# Altium PCB NEMA_PANDORA_PCB.PcbDoc
Units mm, origin at the board's own origin, x right, y up, seen from the top; angles counter-clockwise.
Board outline 63 x 63 mm, 2 copper layers (Top Layer, Bottom Layer); 77 components, 54 nets, 289 pads, 131 vias.
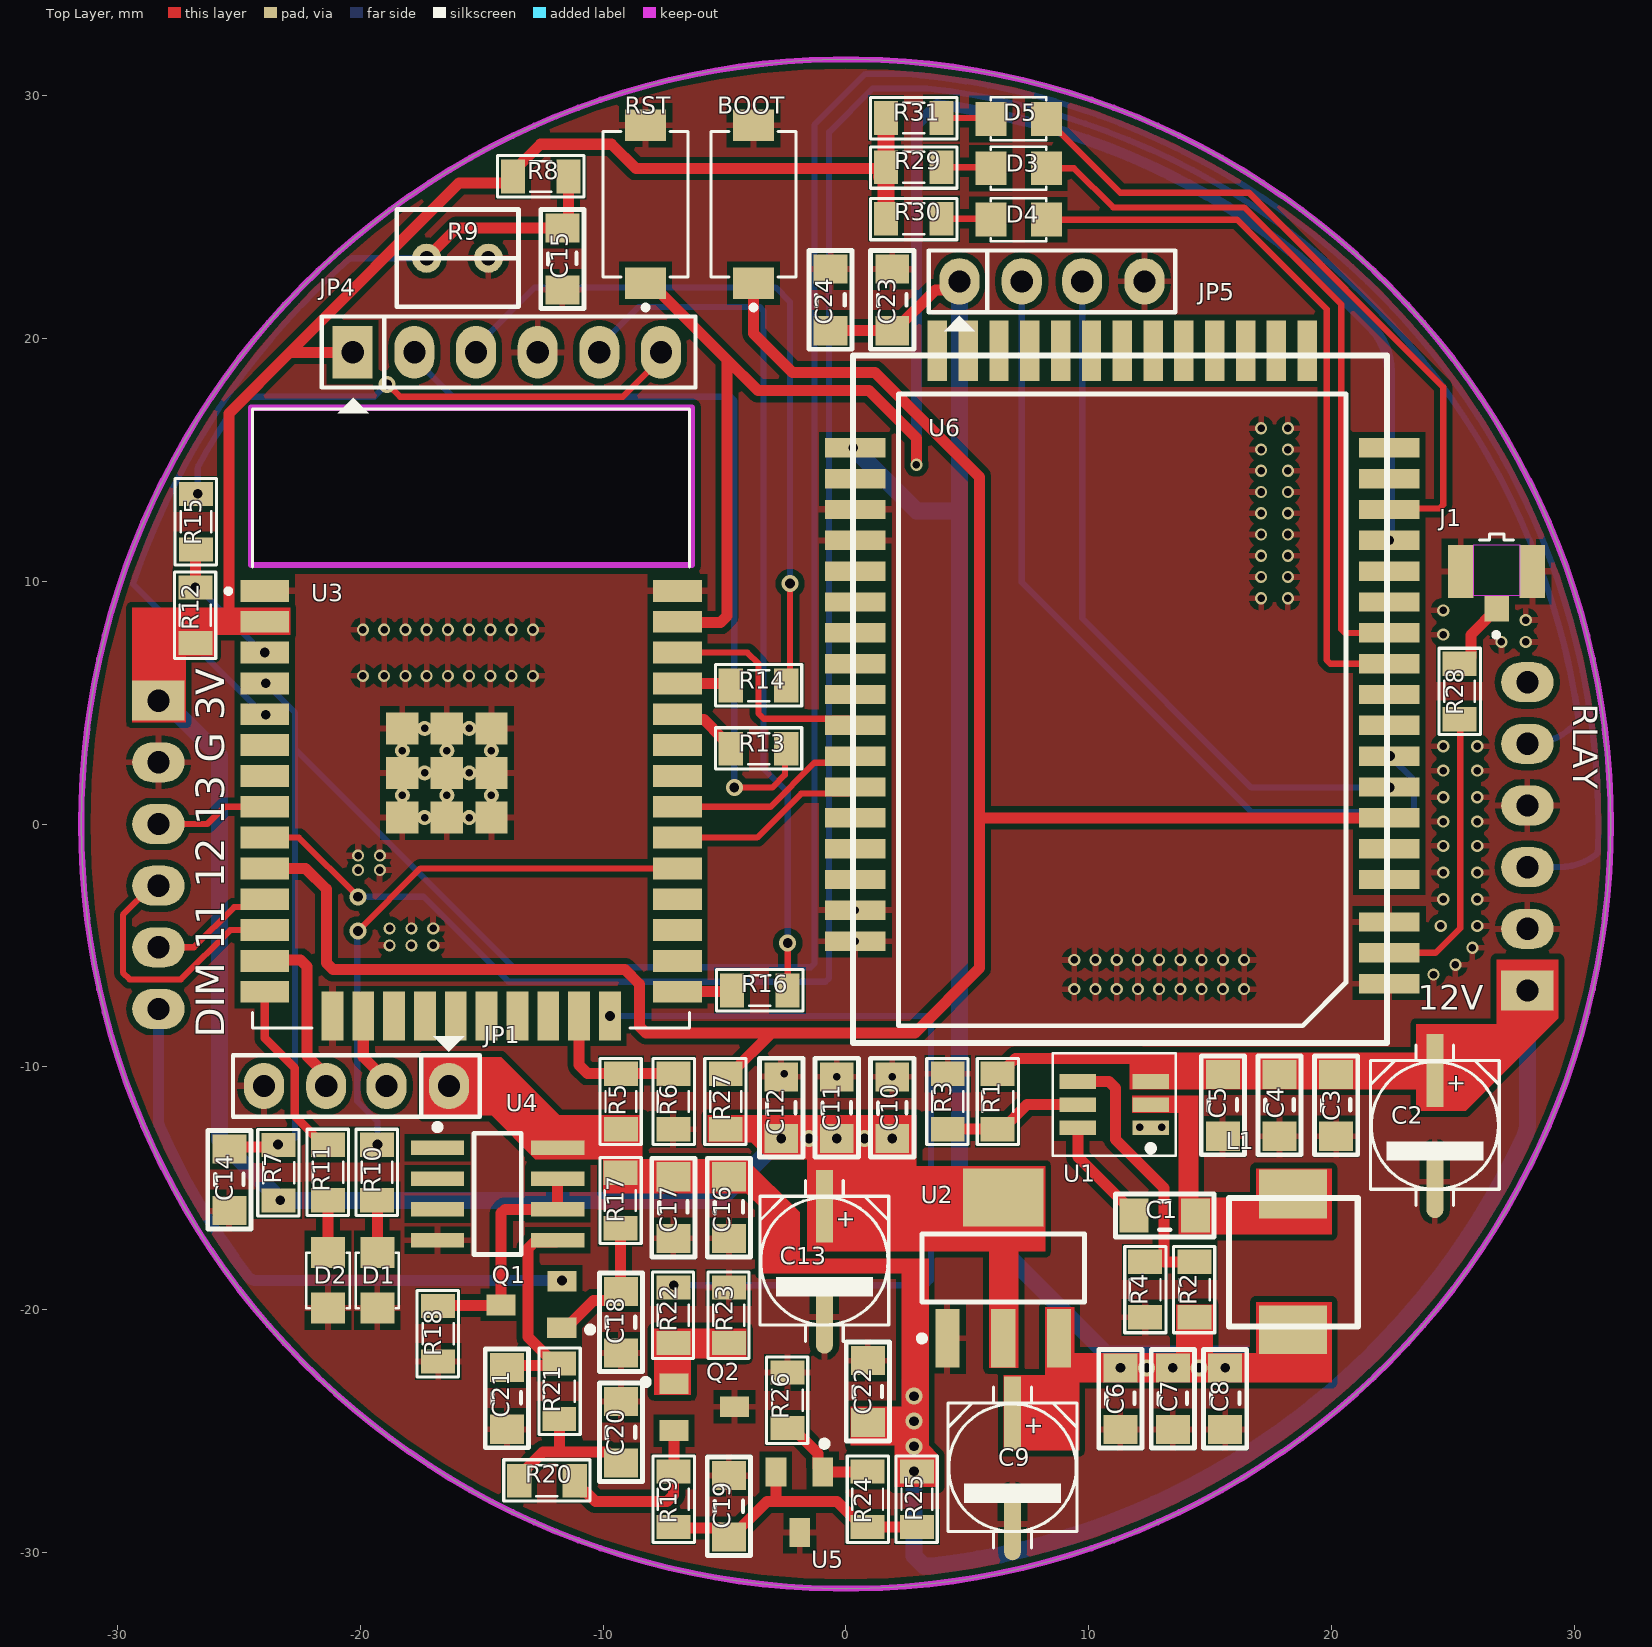
[diagram p0: Top Layer view]
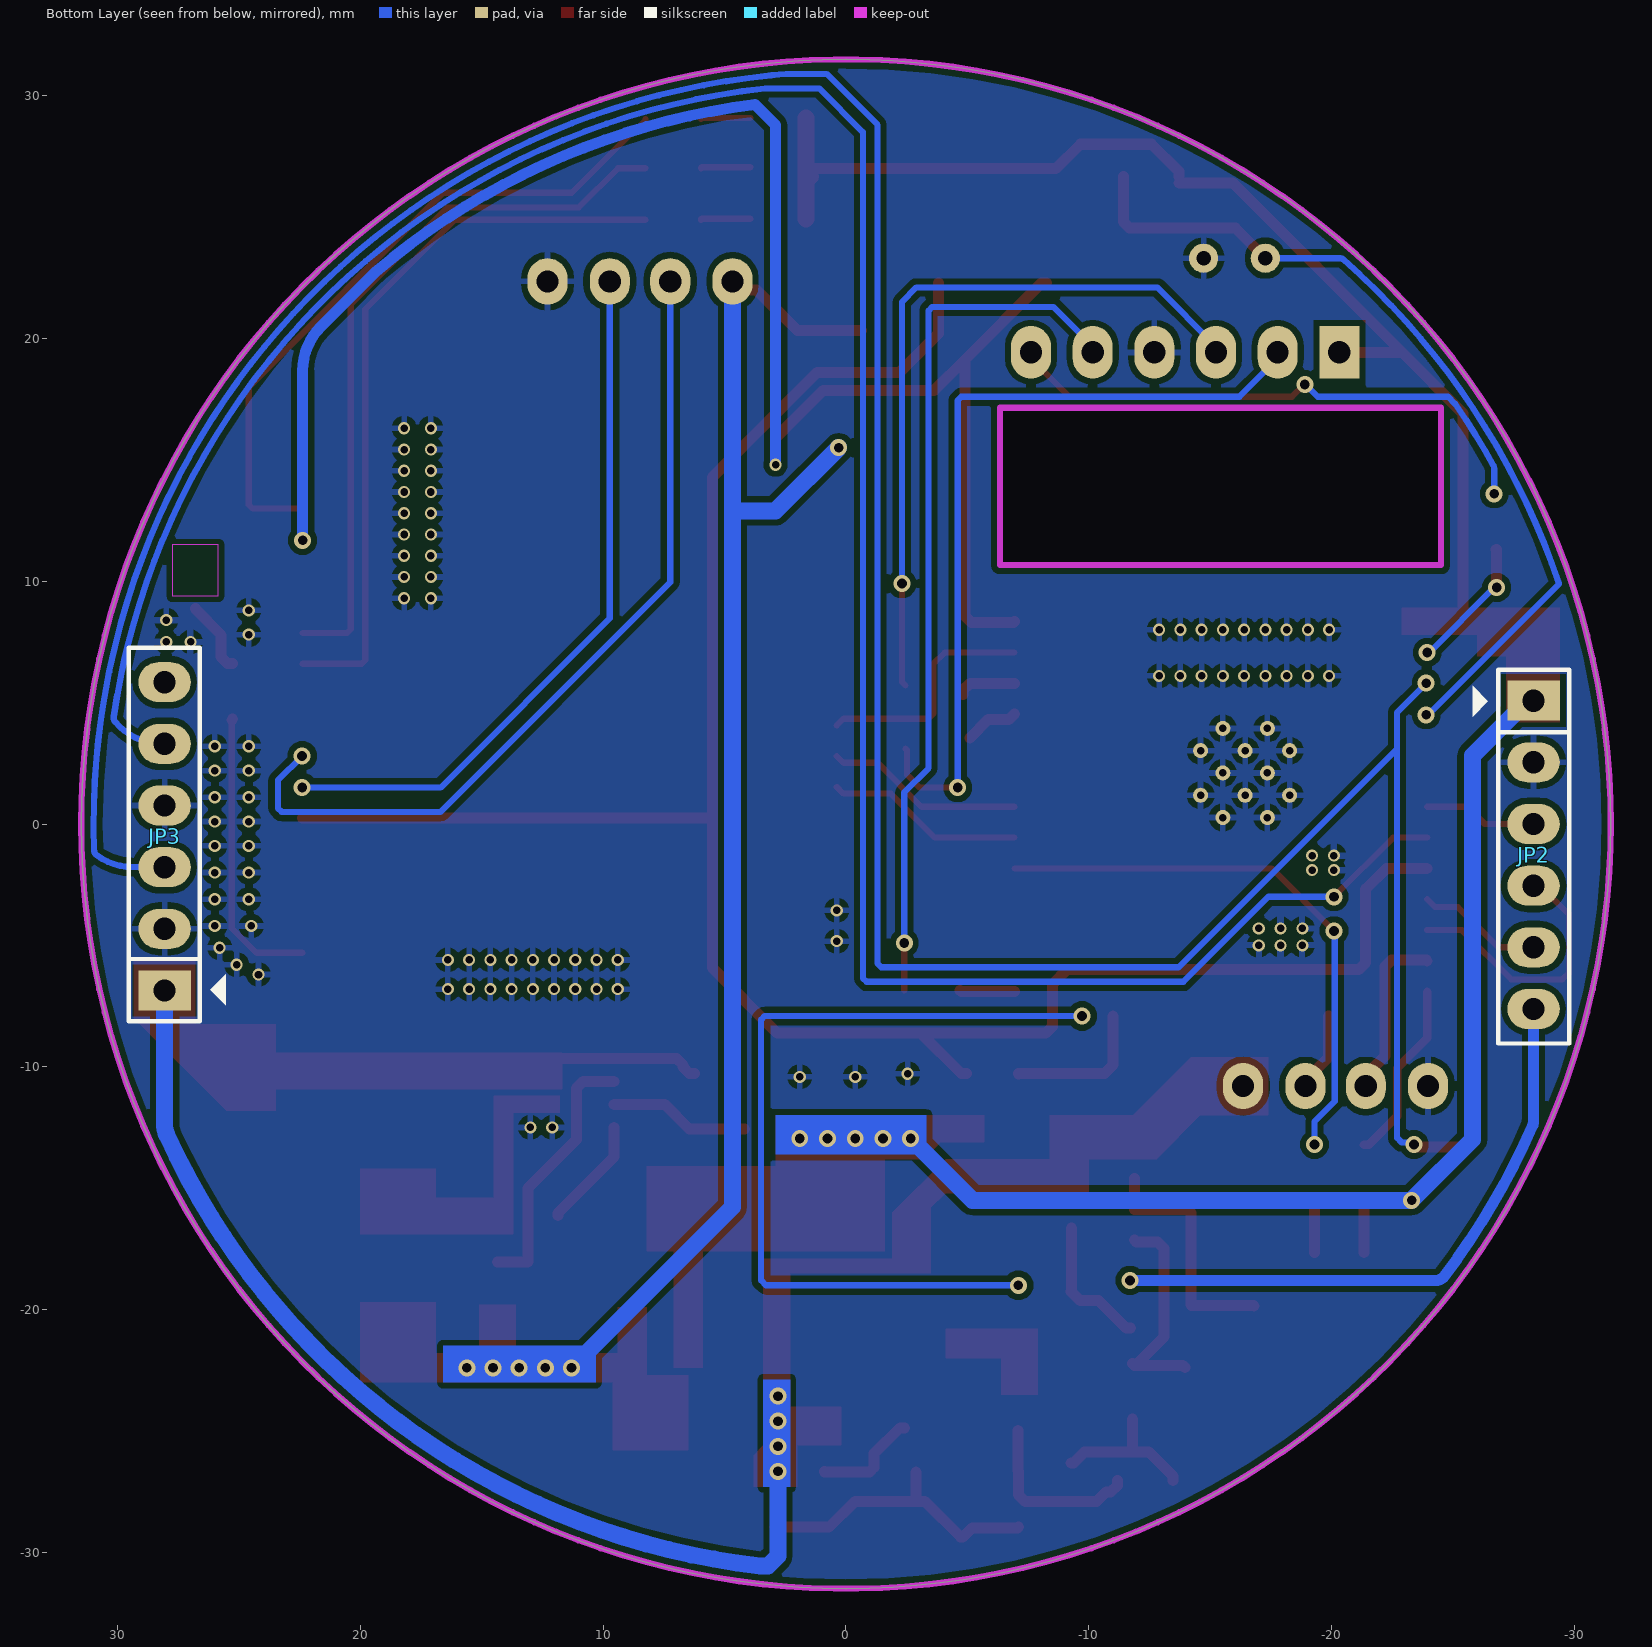
[diagram p1: Bottom Layer view, seen from below]
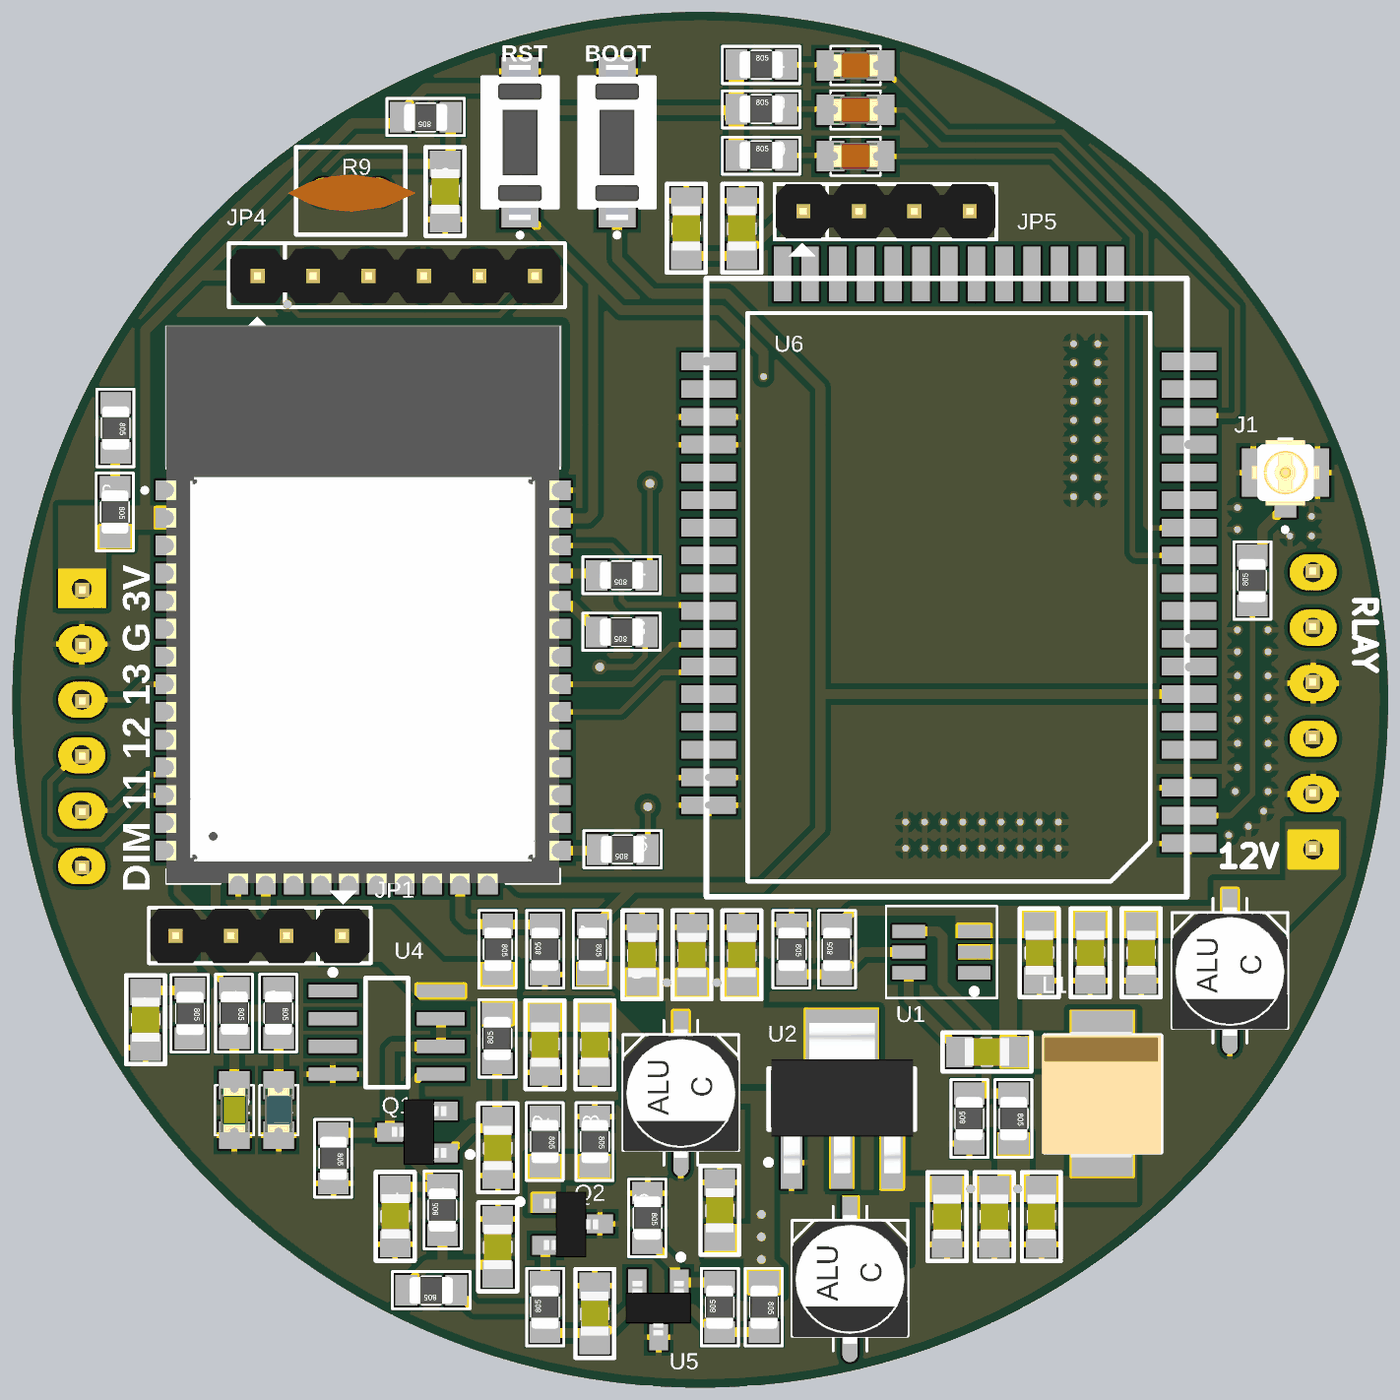
[diagram p2: 3D render of the assembled board from above, using the file's embedded part models]

## Layer stack, top to bottom
Top Solder: solder mask 0.0102, Solder Resist, Dk 3.5
Top Layer: signal copper 0.0356
Dielectric 1: dielectric 0.32, FR-4, Dk 4.8
Bottom Layer: signal copper 0.0356
Bottom Solder: solder mask 0.0102, Solder Resist, Dk 3.5

## Board outline
-31.5,0 ccw(c0,0) 0,-31.5 ccw(c0,0) 31.5,0 ccw(c0,0) 0,31.5 ccw(c0,0)
cut-out: -24.511,10.668 -24.511,17.145 -6.35,17.145 -6.35,10.668

## Design rules (kind name [scope] priority, off if disabled: settings)
Clearance [All] p1: gap=0.254 ignorepadtopadclearanceinfootprint=FALSE
PolygonConnect [All] p1: connectstyle=Relief reliefconductorwidth=0.254 reliefentries=4 polygonreliefangle="90 Angle" airgapwidth=0.254
RoutingVias [All] p1: holewidth=0.711 width=1.27 viastyle="Through Hole" minholewidth=0.31 minwidth=0.5 maxholewidth=0.711 maxwidth=1.27
SilkToSilkClearance [All] p1: silktosilkclearance=0.1
SilkToSolderMaskClearance [IsPad] p1: minsilkscreentomaskgap=0.1 clearancetoexposedcopper=TRUE
SolderMaskExpansion [All] p1: expansion=0.102 istentingtop=FALSE
Width [All] p1: maxlimit=0.7 minlimit=0.254 preferedwidth=0.354
28 further rules are at their usual default settings.

## Classes and differential pairs
net class VOLTAGE_REGULATOR_Nets: +3.3V +5V +12V NetC1_1 NetC1_2 NetR1_1 NetR2_1
net class MCU_Nets: +3.3V +12V BOOT_LORA DIM+ EN LED1 LED2 MISO_LORA MOSI_LORA NetD1_1 NetD2_1 NetJP3_6 NetJP4_2 NetJP4_3 NetJP4_5 NetJP4_6 NetU3_6 NetU3_7 NetU3_17 NetU3_18 NetU3_19 NetU3_20 NetU3_21 NetU3_22 NetU3_26 NetU3_27 NetU3_28 NetU3_33 PIN_8 PIN_11 PIN_12 PIN_13 PIN_23 PIN_25 RELAY RST_LORA RX0 RX_GPS SCK_LORA TEMP_IN TEMP_OUT TX0 TX_GPS
net class LORA_Nets: +3.3V +5V BOOT_LORA LED_NET LED_RX LED_TX MISO_LORA MOSI_LORA NetD3_1 NetD4_1 NetD5_1 NetJ1_1 NetR28_1 NetU6_4 NetU6_5 NetU6_9 NetU6_10 NetU6_13 NetU6_14 NetU6_17 NetU6_18 NetU6_19 NetU6_20 NetU6_21 NetU6_22 NetU6_23 NetU6_24 NetU6_25 NetU6_26 NetU6_27 NetU6_28 NetU6_29 NetU6_30 NetU6_31 NetU6_33 NetU6_36 NetU6_37 NetU6_38 NetU6_39 NetU6_40 NetU6_44 NetU6_45 NetU6_46 RST_LORA RX0_LORA SCK_LORA TX0_LORA
net class DIMMER_Nets: +12V DIM+ NetC18_1 NetC19_2 NetC20_2 NetC21_2 NetQ2_1 NetQ2_2 NetR24_2 NetU4_1 NetU4_2 NetU4_3 OUTB PIN_8
component class VOLTAGE_REGULATOR: C1 C2 C3 C4 C5 C6 C7 C8 C9 C10 C11 C12 C13 L1 R1 R2 R3 R4 U1 U2
component class MCU: C14 C15 D1 D2 JP1 JP2 JP3 JP4 R5 R6 R7 R8 R9 R10 R11 R12 R13 R14 R15 R16 U3
component class LORA: BOOT C23 C24 D3 D4 D5 J1 JP5 R27 R28 R29 R30 R31 rst U6
component class DIMMER: C16 C17 C18 C19 C20 C21 C22 Q1 Q2 R17 R18 R19 R20 R21 R22 R23 R24 R25 R26 U4 U5

## Components (designator, comment, footprint, x,y, rotation, side; value= is the part's Value field where it differs from the comment)
BOOT "TACTILE_2P" "C&K BUTTON 2P" -3.81,25.527 r90 top (schematic designator SW2)
C1 "100nF 50V" CAP_SMD_0805 13.208,-16.129 r180 top
C2 "10uF 16V" CAP-ALU-SMD-C 24.257,-12.446 r270 top
C3 "10uF 50V" CAP_SMD_0805 20.193,-11.67 r90 top
C4 "100nF 50V" CAP_SMD_0805 17.859,-11.67 r90 top
C5 "10uF 50V" CAP_SMD_0805 15.525,-11.67 r90 top
C6 "22uF 25V" CAP_SMD_0805 11.303,-23.749 r90 top
C7 "100nF 50V" CAP_SMD_0805 13.462,-23.749 r90 top
C8 "22uF 25V" CAP_SMD_0805 15.621,-23.749 r90 top
C9 "10uF 16V" CAP-ALU-SMD-C 6.858,-26.543 r270 top
C10 "22uF 25V" CAP_SMD_0805 1.905,-11.608 r270 top
C11 "100nF 50V" CAP_SMD_0805 -0.381,-11.608 r270 top
C12 "22uF 25V" CAP_SMD_0805 -2.667,-11.608 r270 top
C13 "10uF 16V" CAP-ALU-SMD-C -0.889,-18.034 r270 top
C14 "100nF 50V" CAP_SMD_0805 -25.4,-14.732 r90 top
C15 "100nF 50V" CAP_SMD_0805 -11.684,23.197 r90 top
C16 "100nF 50V" CAP_SMD_0805 -4.826,-15.875 r90 top
C17 "100nF 50V" CAP_SMD_0805 -7.112,-15.875 r90 top
C18 "1uF 50V" CAP_SMD_0805 -9.271,-20.447 r270 top
C19 "100nF 50V" CAP_SMD_0805 -4.826,-28.027 r270 top
C20 "100nF 50V" CAP_SMD_0805 -9.271,-24.979 r270 top
C21 "100nF 50V" CAP_SMD_0805 -13.97,-23.735 r90 top
C22 "100nF 50V" CAP_SMD_0805 0.9,-23.3 r270 top
C23 "100nF 50V" CAP_SMD_0805 1.905,21.666 r270 top
C24 "100nF 50V" CAP_SMD_0805 -0.635,21.666 r270 top
D1 "0805 BLUE" LED-0805-Blue -19.304,-17.653 r270 top
D2 "0805 GREEN" LED-0805-Green -21.336,-17.653 r270 top
D3 "0805 RED" LED-0805-Red 5.969,27.013 r0 top
D4 "0805 RED" LED-0805-Red 5.969,24.892 r0 top
D5 "0805 RED" LED-0805-Red 5.969,29.045 r0 top
J1 "ANTENA_IPEX" IPEX 26.8,10.4 r0 top
JP1 "JP4 2.54mm" JP4_M -16.358,-10.795 r180 top
JP2 "JP6 2.54mm" JP6_M -28.321,5.08 r270 bottom locked
JP3 "JP6 2.54mm" JP6_M 28.067,-6.858 r90 bottom
JP4 "JP6 2.54mm" JP6_M -20.32,19.431 r0 top
JP5 "JP4 2.54mm" JP4_M 4.674,22.352 r0 top
L1 "4.7uH 3.2A" L_5.5X5.2 18.288,-18.034 r270 top
Q1 "2N7002" SOT-23-3 -12.827,-19.812 r90 top
Q2 "2N7002" SOT-23-3 -5.969,-24.003 r270 top
R1 "10K 1%" RES_SMD_0805 6.246,-11.43 r90 top
R2 "56.2K 1%" RES_SMD_0805 14.351,-19.177 r270 top
R3 "10K 1%" RES_SMD_0805 4.191,-11.43 r270 top
R4 "10K 1%" RES_SMD_0805 12.319,-19.177 r90 top
R5 "10K 1%" RES_SMD_0805 -9.271,-11.43 r270 top
R6 "10K 1%" RES_SMD_0805 -7.112,-11.43 r90 top
R7 "10K 1%" RES_SMD_0805 -23.368,-14.365 r270 top
R8 "10K 1%" RES_SMD_0805 -12.573,26.67 r180 top
R9 "10K 3%" NTC_2.54. -14.732,23.305 r180 top
R10 "330R 1%" RES_SMD_0805 -19.317,-14.351 r270 top
R11 "330R 1%" RES_SMD_0805 -21.336,-14.351 r270 top
R12 "10K 1%" RES_SMD_0805 -26.8,8.6 r270 top
R13 "1K 1%" RES_SMD_0805 -3.6,3.1 r180 top
R14 "1K 1%" RES_SMD_0805 -3.6,5.7 r180 top
R15 "1K 1%" RES_SMD_0805 -26.772,12.446 r270 top
R16 "1K 1%" RES_SMD_0805 -3.556,-6.858 r180 top
R17 "120K 1%" RES_SMD_0805 -9.296,-15.508 r90 top
R18 "10K 1%" RES_SMD_0805 -16.8,-21 r270 top
R19 "4.7K 1%" RES_SMD_0805 -7.112,-27.813 r90 top
R20 "120K 1%" RES_SMD_0805 -12.319,-27.051 r180 top
R21 "120K 1%" RES_SMD_0805 -11.811,-23.368 r90 top
R22 "1K 1%" RES_SMD_0805 -7.112,-20.233 r270 top
R23 "10K 1%" RES_SMD_0805 -4.826,-20.233 r270 top
R24 "120K 1%" RES_SMD_0805 0.889,-27.813 r90 top
R25 "330R 1%" RES_SMD_0805 2.921,-27.813 r270 top
R26 "39.2K 1%" RES_SMD_0805 -2.413,-23.735 r270 top
R27 "10K 1%" RES_SMD_0805 -4.953,-11.43 r270 top
R28 "0R" RES_SMD_0805 25.273,5.461 r90 top
R29 "330R 1%" RES_SMD_0805 2.794,27.051 r0 top
R30 "330R 1%" RES_SMD_0805 2.794,24.93 r0 top
R31 "330R 1%" RES_SMD_0805 2.794,29.083 r0 top
RST "TACTILE_2P" "C&K BUTTON 2P" -8.255,25.527 r90 top (schematic designator SW1)
U1 "AP62300WU-7" SOT-23-6 11.049,-11.557 r180 top
U2 "LM1117IMPX-3.3" SOT-223-4 6.477,-18.288 r90 top
U3 "ESP32-WROOM-32E-H4" ESP32-WROOM-32 -16.411,2.109 r0 top
U4 "LM358DR" "8 - SOIC" -14.351,-15.24 r0 top
U5 "TL431CDBZR" SOT-23-3 -1.905,-27.813 r180 top
U6 "WS7300" WS7300-S 22.381,-6.477 r180 top

## Footprints (in the part's own frame and the unit in brackets; to place one, negate y for a bottom-side part, rotate by r counter-clockwise, add the part's x,y. Pads: shape width x height; smd on the part's side, far side on the other; paste and mask are expansions set on the pad)
"8 - SOIC" [mm]
  rect 2.2x0.6 smd: 1(-2.475,1.905) 2(-2.475,0.635) 3(-2.475,-0.635) 4(-2.475,-1.905) 5(2.475,-1.905) 6(2.475,-0.635) 7(2.475,0.635) 8(2.475,1.905)
  silkscreen extent -2.6,-2.5 0.98,2.88, body extent -3.2,-2.5 3.2,2.5, height 1.75
"C&K BUTTON 2P" [mm]
  rect 1.3x1.7 smd: 1(-3.25,0) 2(3.25,0)
  silkscreen extent -4.35,-1.75 3,1.75, body extent -3.55,-1.75 3.55,1.75, height 4.3
CAP-ALU-SMD-C [mm]
  rect 3x0.7 smd: 1(-2.286,0)
  oval 3x0.7 smd: 2(2.286,0)
  silkscreen extent -3.35,-2.65 3.28,2.65, body extent -2.95,-2.65 2.95,2.65, height 5.41
CAP_SMD_0805 [mm]
  rect 1.2x1.4 smd: 1(-1.194,0) 2(1.346,0)
  silkscreen extent -1.96,-0.89 2.11,0.89, body extent -0.93,-0.64 1.09,0.63, height 0.61
ESP32-WROOM-32 [mm]
  rect 2x0.9 smd: 1(-7.529,7.493) 2(-7.529,6.223) 3(-7.529,4.953) 4(-7.529,3.683) 5(-7.529,2.413) 6(-7.529,1.143) 7(-7.529,-0.127) 8(-7.529,-1.397) 9(-7.529,-2.667) 10(-7.529,-3.937) 11(-7.529,-5.207) 12(-7.529,-6.477) 13(-7.529,-7.747) 14(-7.529,-9.017) 25(9.471,-9.017) 26(9.471,-7.747) 27(9.471,-6.477) 28(9.471,-5.207) 29(9.471,-3.937) 30(9.471,-2.667) 31(9.471,-1.397) 32(9.471,-0.127) 33(9.471,1.143) 34(9.471,2.413) 35(9.471,3.683) 36(9.471,4.953) 37(9.471,6.223) 38(9.471,7.493)
  rect 0.9x2 smd: 15(-4.744,-10.017) 16(-3.474,-10.017) 17(-2.204,-10.017) 18(-0.934,-10.017) 19(0.336,-10.017) 20(1.606,-10.017) 21(2.876,-10.017) 22(4.146,-10.017) 23(5.416,-10.017) 24(6.686,-10.017)
  rect 1.33x1.33 smd: 39_1(-1.864,1.828) 39_2(-0.029,1.828) 39_3(1.806,1.828) 39_4(-1.864,-0.007) 39_5(-0.029,-0.007) 39_6(1.806,-0.007) 39_7(-1.864,-1.842) 39_8(-0.029,-1.842) 39_9(1.806,-1.842)
  round 0.62 hole 0.31: 39_10(-0.946,1.828) 39_11(0.889,1.828) 39_12(-1.864,0.911) 39_13(-0.029,0.911) 39_14(1.806,0.911) 39_15(-0.946,-0.007) 39_16(0.889,-0.007) 39_17(-1.864,-0.924) 39_18(-0.029,-0.924) 39_19(1.806,-0.924) 39_20(-0.946,-1.842) 39_21(0.889,-1.842)
  silkscreen extent -9.13,-10.52 9.97,14.98, body extent -8.05,-10.52 9.95,14.98, height 3.2
IPEX [mm]
  rect 1x1.05 smd: 1(0,-1.525)
  rect 1.05x2.2 smd: 2(1.475,0) 3(-1.475,0)
  Keep-Out Layer region: 0.95,-1 -0.95,-1 -0.95,1.1 0.95,1.1
  silkscreen extent -0.7,-2.71 0.7,1.55, body extent -1.5,-1.55 1.5,1.55, height 1.25
JP4_M [mil]
  oval 65x75 hole 36: 1(0,0) 2(101,0) 3(199,0) 4(300,0)
  silkscreen extent -50,-81 350,50, body extent -48,-48 348,50, height 323
JP6_M [mil]
  rect 65x85 hole 36: 1(0,0)
  oval 65x85 hole 36: 2(100,0) 3(200,0) 4(300,0) 5(400,0) 6(500,0)
  silkscreen extent -50,-99 556,58, body extent -48,-50 548,48, height 323
L_5.5X5.2 [mm]
  rect 2x2.8 smd: 1(-2.794,0.127) 2(2.794,0.127)
  silkscreen extent -2.63,-2.51 2.67,2.79, body extent -2.82,-2.64 2.92,2.79, height 2.03
LED-0805-Blue [mil]
  rect 50x55 smd: 1(0,0) 2(90,0)
  silkscreen extent 0,-35 90,35, body extent 5,-25 85,25, height 43
LED-0805-Green [mil]
  rect 50x55 smd: 1(0,0) 2(90,0)
  silkscreen extent 0,-35 90,35, body extent 5,-25 85,25, height 43
LED-0805-Red [mil]
  rect 50x55 smd: 1(0,0) 2(90,0)
  silkscreen extent 0,-35 90,35, body extent 5,-25 85,25, height 43
NTC_2.54. [mm]
  round 1.2 hole 0.6: 1(0,0) 2(2.54,0)
  silkscreen extent -1.23,-2 3.77,2, body extent -1.7,-0.75 4.14,0.95, height 6.12
RES_SMD_0805 [mil]
  rect 39.37x55 smd: 1(-45,0) 2(45,0)
  silkscreen extent -70,-34 70,33, body extent -39,-25 39,25, height 31
SOT-23-3 [mm]
  rect 0.85x1.2 smd: 1(-0.945,-1.118) 2(0.98,-1.123) 3(0,1.377)
  silkscreen extent -1.14,-2.41 -0.89,-2.16, body extent -1.48,-1.2 1.52,1.3, height 1.06
SOT-23-6 [mm]
  rect 1.5x0.6 smd: 1(-1.5,0.95) 2(-1.5,0) 3(-1.5,-0.95) 4(1.5,-0.95) 5(1.5,0) 6(1.5,0.95)
  silkscreen extent -2.54,-2.11 2.54,2.11, body extent -1.75,-1.52 1.75,1.53, height 1.45
SOT-223-4 [mm]
  rect 2.4x1 smd: 1(-2.9,2.3) 2(-2.9,0) 3(-2.9,-2.3)
  rect 2.4x3.3 smd: 4(2.9,0)
  silkscreen extent -3.02,-3.35 1.4,3.47, body extent -3.39,-3.27 3.5,3.23, height 1.72
WS7300-S [mm]
  rect 2.5x0.8 smd: 1(0,0.099) 2(0,-1.171) 3(0,-2.441) 4(0,-4.191) 5(0,-5.461) 6(0,-6.731) 7(0,-8.001) 8(0,-9.271) 9(0,-10.541) 10(0,-11.811) 11(0,-13.081) 12(0,-14.351) 13(0,-15.621) 14(0,-16.891) 15(0,-18.161) 16(0,-19.431) 17(0,-20.701) 18(0,-21.971) 32(22,-21.971) 33(22,-20.701) 34(22,-19.431) 35(22,-18.161) 36(22,-16.891) 37(22,-15.621) 38(22,-14.351) 39(22,-13.081) 40(22,-11.811) 41(22,-10.541) 42(22,-9.271) 43(22,-8.001) 44(22,-6.731) 45(22,-5.461) 46(22,-4.191) 47(22,-2.921) 48(22,-1.651)
  rect 0.8x2.5 smd: 19(3.38,-25.971) 20(4.65,-25.971) 21(5.92,-25.971) 22(7.19,-25.971) 23(8.46,-25.971) 24(9.73,-25.971) 25(11,-25.971) 26(12.27,-25.971) 27(13.54,-25.971) 28(14.81,-25.971) 29(16.08,-25.971) 30(17.35,-25.971) 31(18.62,-25.971)
  silkscreen extent 0.1,-25.78 22.1,2.54, body extent -0.25,-26.04 22.35,2.54, height 3.1

## Part data
BOOT RST: library part SWITCH_TACTILE_2P, "Tactile Switch SPST-NO Top Actuated Surface Mount", Manufacture Part Number="PTS636 SM43 SMTR LFS", Manufacturer=C&K, Link=https://www.digikey.com/en/products/detail/c-k/PTS636-SM43-SMTR-LFS/10071723, Packaging="Cut Tape (CT)", Price=$0.19
C1 C4 C7 C11 C14 C15 C16 C17 C19 C20 C21 C22 C23 C24: library part C0805_MLCC_100nF_50V, "0.1 µF ±10% 50V Ceramic Capacitor X7R 0805 (2012 Metric)", Manufacture Part Number=CC0805KRX7R9BB104, Manufacturer=YAGEO, Link=https://www.digikey.cn/en/products/detail/yageo/CC0805KRX7R9BB104/302874, Packaging="Cut Tape (CT)", Price=$0.10
C2 C9 C13: library part C_ALU_10uF_16V, "10 µF 16 V Aluminum - Polymer Capacitors Radial, Can - SMD 30mOhm 2000 Hrs @ 105°C", Manufacture Part Number=875105359001, Manufacturer="Würth Elektronik", Link=https://www.digikey.cn/en/products/detail/w%C3%BCrth-elektronik/875105359001/5147580, Packaging="Cut Tape (CT)", Price=$0.51, Size code=C
C3 C5: library part C0805_MLCC_10uF_50V, "10 µF ±20% 50V Ceramic Capacitor X5R 0805 (2012 Metric)", Manufacture Part Number=GRM21BR61H106ME43L, Manufacturer="Murata Electronics", Link=https://www.digikey.cn/en/products/detail/murata-electronics/GRM21BR61H106ME43L/10326317, Packaging="Cut Tape (CT)", Price=$0.34
C6 C8 C10 C12: library part C0805_MLCC_22uF_25V, "22 µF ±20% 25V Ceramic Capacitor X5R 0805 (2012 Metric)", Manufacture Part Number=CL21A226MAYNNNE, Manufacturer="Samsung Electro-Mechanics", Link=https://www.digikey.cn/en/products/detail/samsung-electro-mechanics/CL21A226MAYNNNE/10479857, Packaging="Cut Tape (CT)", Price=$0.25
C18: library part C0805_MLCC_1uF_50V, "1 µF ±10% 50V Ceramic Capacitor X7R 0805 (2012 Metric)", Manufacture Part Number=CL21B105KBFNNNG, Manufacturer="Samsung Electro-Mechanics", Link=https://www.digikey.cn/en/products/detail/samsung-electro-mechanics/CL21B105KBFNNNG/3894467, Packaging="Cut Tape (CT)", Price=$0.11
D1: library part LED_0805_BLUE, "Blue 470nm LED Indication - Discrete 3.2V 0805 (2012 Metric)", Manufacture Part Number=150080BS75000, Manufacturer="Würth Elektronik", Link=https://www.digikey.cn/en/products/detail/w%C3%BCrth-elektronik/150080BS75000/4489912, Packaging="Cut Tape (CT)", Price=$0.19
D2: library part LED_0805_GREEN, "Green 520nm LED Indication - Discrete 3.2V 0805 (2012 Metric)", Manufacture Part Number=150080GS75000, Manufacturer="Würth Elektronik", Link=https://www.digikey.cn/en/products/detail/w%C3%BCrth-elektronik/150080GS75000/4489915, Packaging="Cut Tape (CT)", Price=$0.19
D3 D4 D5: library part LED_0805_RED, "Red 625nm LED Indication - Discrete 2V 0805 (2012 Metric)", Manufacture Part Number=150080RS75000, Manufacturer="Würth Elektronik", Link=https://www.digikey.cn/en/products/detail/w%C3%BCrth-elektronik/150080RS75000/4489918, Packaging="Cut Tape (CT)", Price=$0.19
J1: "U.FL (UMCC), IPEX MHFI Connector Receptacle, Male Pin Surface Mount Solder", Manufacture Part Number=20279-001E-03, Manufacturer=I-PEX, Link=https://www.digikey.com/en/products/detail/i-pex/20279-001E-03/22108814, Packaging="Cut Tape (CT)", Price=$1.77
JP1 JP5: library part JP4M, "Connector Header Through Hole 4 position 0.100\" (2.54mm)", Manufacture Part Number=61300411121, Manufacturer="Würth Elektronik", Link=https://www.digikey.cn/en/products/detail/w%C3%BCrth-elektronik/61300411121/4846827?s=N4IgTCBcDaIGwEYDMAGFAWBWwJAXQF8g, Packaging=Bulk, Price=$0.19
JP2 JP3 JP4: library part JP6M, "Connector Header Through Hole 6 position 0.100\" (2.54mm)", Manufacture Part Number=61300611121, Manufacturer="Würth Elektronik", Link=https://www.digikey.cn/en/products/detail/w%C3%BCrth-elektronik/61300611121/4846833, Packaging=Bulk, Price=$0.35
L1: library part L_SMD_4.7uH_3.2A, "4.7 µH Shielded Molded Inductor 3.2 A 81.3mOhm Max Nonstandard", Manufacture Part Number=IHLP2020BZER4R7M11, Manufacturer="Vishay Dale", Link=https://www.digikey.com/en/products/detail/vishay-dale/IHLP2020BZER4R7M11/2025062, Packaging="Cut Tape (CT)", Price=$1.19
Q1 Q2: "N-Channel 60 V 115mA (Ta) 200mW (Ta) Surface Mount SOT-23-3", Manufacturer=onsemi, Link=https://www.digikey.com/en/products/detail/onsemi/2N7002/244664, Manufacture Part Number=2N7002, Packaging="Cut Tape (CT)", Price=$0.45
R1 R3 R4 R5 R6 R7 R8 R12 R18 R23 R27: library part R0805_10K, "10 kOhms ±1% 0.125W, 1/8W Chip Resistor 0805 (2012 Metric) Moisture Resistant Thick Film", Manufacture Part Number=RC0805FR-0710KL, Manufacturer=YAGEO, Link=https://www.digikey.cn/en/products/detail/yageo/RC0805FR-0710KL/727535, Packaging="Cut Tape (CT)", Price=$0.10
R2: library part R0805_56.2K, "56.2 kOhms ±1% 0.125W, 1/8W Chip Resistor 0805 (2012 Metric) Moisture Resistant Thick Film", Manufacture Part Number=RC0805FR-0756K2L, Manufacturer=YAGEO, Link=https://www.digikey.com/en/products/detail/yageo/RC0805FR-0756K2L/728035, Packaging="Cut Tape (CT)", Price=$0.10
R9: library part NTC_10K_, "NTC Thermistor 10k Bead", Manufacture Part Number=NTCLE203E3103HB0, Manufacturer="Vishay Beyschlag/Draloric/BC Components", Link=https://www.digikey.com/en/products/detail/vishay-beyschlag-draloric-bc-components/NTCLE203E3103HB0/2230772, Packaging=Bulk, Price=$0.13
R10 R11 R25 R29 R30 R31: library part R0805_330R, "330 Ohms ±1% 0.125W, 1/8W Chip Resistor 0805 (2012 Metric) Automotive AEC-Q200 Thick Film", Manufacture Part Number=RMCF0805FT330R, Manufacturer="Stackpole Electronics Inc", Link=https://www.digikey.cn/en/products/detail/stackpole-electronics-inc/RMCF0805FT330R/1760484, Packaging="Cut Tape (CT)", Price=$0.10
R13 R14 R15 R16 R22: library part R0805_1K, "1 kOhms ±1% 0.125W, 1/8W Chip Resistor 0805 (2012 Metric) Moisture Resistant Thick Film", Manufacture Part Number=311-1.00KCRCT-ND, Manufacturer=YAGEO, Link=https://www.digikey.com/en/products/detail/yageo/RC0805FR-071KL/727444, Packaging="Cut Tape (CT)", Price=$0.10
R17 R20 R21 R24: library part R0805_120K, "120 kOhms ±1% 0.125W, 1/8W Chip Resistor 0805 (2012 Metric) Moisture Resistant Thick Film", Manufacture Part Number=RC0805FR-07120KL, Manufacturer=YAGEO, Link=https://www.digikey.com/en/products/detail/yageo/RC0805FR-07120KL/727576, Packaging="Cut Tape (CT)", Price=$0.10
R19: library part R0805_4.7K, "4.7 kOhms ±1% 0.125W, 1/8W Chip Resistor 0805 (2012 Metric) Thick Film", Manufacture Part Number=CRCW08054K70FKEAC, Manufacturer="Vishay Dale", Link=https://www.digikey.com/en/products/detail/vishay-dale/CRCW08054K70FKEAC/7928553, Packaging="Cut Tape (CT)", Price=$0.10
R26: library part R0805_39.2K, "39.2 kOhms ±1% 0.125W, 1/8W Chip Resistor 0805 (2012 Metric) Moisture Resistant Thick Film", Manufacture Part Number=RC0805FR-0739K2L, Manufacturer=YAGEO, Link=https://www.digikey.com/en/products/detail/yageo/RC0805FR-0739K2L/727901, Packaging="Cut Tape (CT)", Price=$0.10
R28: library part R0805_0R, "0 Ohms Jumper Chip Resistor 0805 (2012 Metric) Automotive AEC-Q200 Thick Film", Manufacture Part Number=CRCW08050000Z0EA, Manufacturer="Vishay Dale", Link=https://www.digikey.cn/en/products/detail/vishay-dale/CRCW08050000Z0EA/1175125, Packaging="Cut Tape (CT)", Price=$0.10
U1: "Buck Switching Regulator IC Positive Adjustable 0.8V 1 Output 3A SOT-23-6 Thin, TSOT-23-6", Manufacturer="Diodes Incorporated", Link=https://www.digikey.cn/en/products/detail/diodes-incorporated/AP62300WU-7/12324870?s=N4IgTCBcDaIIIAUBsYDMAGdB1AqiAugL5A, Manufacture Part Number=AP62300WU-7, Packaging="Cut Tape (CT)", Price=$0.46
U2: library part LM1117IMPX-3.3/NOPB, "Linear Voltage Regulator IC Positive Fixed 1 Output 800mA SOT-223-4", Manufacturer="Texas Instruments", Link=https://www.digikey.cn/en/products/detail/texas-instruments/LM1117IMPX-3-3-NOPB/1870906, Manufacture Part Number=LM1117IMPX-3.3/NOPB, Packaging="Cut Tape (CT)", Price=$1.14
U3: "Bluetooth, WiFi 802.11b/g/n, Bluetooth v4.2 +EDR, Class 1, 2 and 3 Transceiver Module 2.4GHz ~ 2.5GHz Integrated, Trace Surface Mount", Manufacturer="Espressif Systems", Link=https://www.digikey.cn/en/products/detail/espressif-systems/ESP32-WROOM-32E-H4/12696413, Manufacture Part Number=ESP32-WROOM-32E-H4, Packaging="Cut Tape (CT)", Price=$2.68
U4: "General Purpose Amplifier 2 Circuit 8-SOIC", Manufacturer="Texas Instruments", Link=https://www.digikey.cn/en/products/detail/texas-instruments/LM358DR/276658, Manufacture Part Number=LM358DR, Packaging="Cut Tape (CT)", Price=$0.41
U5: "Shunt Voltage Reference IC Adjustable 2.495V 36 VV ±2.2% 100 mA SOT-23-3", Manufacturer="Texas Instruments", Link=https://www.digikey.com/en/products/detail/texas-instruments/TL431CDBZR/686858, Manufacture Part Number=TL431CDBZR, Packaging="Cut Tape (CT)", Price=$0.47
U6: "Wi-SUN wireless communication modules based on the VC7300BU chip from Lireda", Manufacturer=Lireda, Manufacture Part Number=WS7300

## Via types
v1: diameter 0.5, hole 0.31, Top Layer to Bottom Layer, tented both sides, 76 vias
v2: diameter 0.7, hole 0.4, Top Layer to Bottom Layer, tented both sides, 32 vias
v3: diameter 0.5/0.5 (per signal layer), hole 0.31, Top Layer to Bottom Layer, tented both sides, 20 vias
v4: diameter 0.7, hole 0.41, Top Layer to Bottom Layer, tented both sides, 3 vias

## Nets (pads, with @x,y where several pads share a name; then routed paths per layer and width w, separated by ;. In a path a pad name is that pad's centre, name@x,y a point inside that pad or via, vN(x,y) a via of type N, cw(c..) or ccw(c..) an arc to the next point about the centre after c; other vN are vias at no path point)
+3.3V: C10.2 C11.2 C12.2 C13.1 JP2.1 JP4.1 R7.2 R8.2 R12.2 R27.2 R29.1 R30.1 R31.1 U2.2 U2.4 U3.2 | length 92.2
  Top Layer w0.454: -25.4,8.3 -25.421,8.321 -25.421,16.915 -22.906,19.431 ; JP4.1 -22.906,19.431 ; R8.2@-13.716,26.4 -15.937,26.4 -22.906,19.431 ; R8.2 -13.716,26.868 -12.584,28 -9.659,28 -8.659,27 1.6,27 R29.1
  Top Layer w0.7: R29.1@1.468,26.67 R29.1@1.651,26.853 ; R30.1 R29.1@1.651,26.853 ; R31.1 R29.1 R29.1@1.651,26.853
  Bottom Layer w0.7: JP2.1 -28.067,5.08 -25.8,2.813 -25.8,-13 v2(-23.3,-15.5) -5.213,-15.5 v2(-2.667,-12.954)
  other v2: -1.524,-12.954 -0.381,-12.954 0.762,-12.954 1.905,-12.954
+5V: C6.2 C7.2 C8.2 C9.1 C23.2 C24.2 JP5.1 L1.2 R2.2 U2.3 U6.32 | length 59.1
  Top Layer w0.454: C24.2 C23.2 2.005,20.32 3.681,21.996 4.318,21.996 JP5.1
  Bottom Layer w0.7: v2(0.3,15.5) 2.9,12.9 4.674,12.9 ; JP5.1 4.674,12.9 ; v2(11.303,-22.403) 4.674,-15.773 4.674,12.9
  other v2: 12.383,-22.4 13.462,-22.403 14.541,-22.4 15.621,-22.403
+12V: C2.1 C3.2 C4.2 C5.2 C16.2 C17.2 C22.2 JP1.1 JP3.1 R1.2 R5.2 R17.2 R25.1 U1.3 U4.8 | length 48.2
  Top Layer w0.454: R1.2 6.444,-10.287 6.717,-10.014 6.717,-9.918 6.983,-9.652 12.192,-9.652
  Bottom Layer w0.7: v2(2.8,-26.667) 2.8,-30.155 3.005,-30.36 3.21,-30.565 3.5,-30.565 3.541,-30.565 ccw(c0,0) 27.967,-12.828 ccw(c-0.058,0.026) 28.005,-12.746 ccw(c27.367,-12.458) 28.067,-12.459 JP3.1
  other v2: 2.8,-25.633 2.8,-24.6 2.8,-23.567
BOOT_LORA: BOOT.1 R27.1 U3.10 U6.6 | length 89.7
  Top Layer w0.454: U3.10 -22.259,-1.828 -21.4,-2.687 -21.4,-5.734 -21.134,-6 -9.1,-6 -8.5,-6.6 -8.5,-8.334 -8.234,-8.6 -3.068,-8.6 ; R27.1 -4.755,-10.287 -3.068,-8.6 ; BOOT.1 -3.81,20.21 -2.2,18.6 1.2,18.6 5.5,14.3 5.5,0.254 ; U6.6 5.5,0.254 ; -3.068,-8.6 2.834,-8.6 5.5,-5.934 5.5,0.254
DIM+: JP2.6 Q1.2 | length 25
  Bottom Layer w0.454: JP2.6 -28.321,-12.245 ccw(c-27.867,-12.243) -28.282,-12.428 ccw(c0,0) -24.649,-18.621 ccw(c-24.288,-18.346) -24.289,-18.8 v2(-11.7,-18.8)
EN: R12.1 R15.2 U3.3 | length 5.5
  Top Layer w0.454: v2(-26.8,9.743) -26.8,11.275 cw(c-26.772,11.275) R15.2
  Bottom Layer w0.254: v2(-26.8,9.743) -26.711,9.743 -24.029,7.062 v2(-23.94,7.062)
GND: BOOT.2 C2.2 C3.1 C4.1 C5.1 C6.1 C7.1 C8.1 C9.2 C10.1 C11.1 C12.1 C13.2 C14.1 C15.1 C16.1 C17.1 C18.2 C19.1 C20.1 C21.1 C22.1 C23.1 C24.1 D1.2 D2.2 J1.2 J1.3 JP1.4 JP2.2 JP3.2 JP3.4 JP4.4 JP5.4 Q2.3 R3.1 R4.1 R6.1 R9.1 R18.2 R23.1 R26.1 RST.2 U1.1 U2.1 U3.1 U3.15 U3.38 U3.39_1 U3.39_2 U3.39_3 U3.39_4 U3.39_5 U3.39_6 U3.39_7 U3.39_8 U3.39_9 U3.39_10 U3.39_11 U3.39_12 U3.39_13 U3.39_14 U3.39_15 U3.39_16 U3.39_17 U3.39_18 U3.39_19 U3.39_20 U3.39_21 U4.4 U5.3 U6.1 U6.3 U6.34 U6.35 U6.47 U6.48
  other v1: 12.1,-12.5 13,-12.5 -0.381,-10.414 1.905,-10.414 -2.54,-10.287 9.4,-6.8 10.275,-6.8 11.15,-6.8 12.025,-6.8 12.9,-6.8 13.775,-6.8 14.65,-6.8 15.525,-6.8 16.4,-6.8 9.4,-5.6 10.275,-5.6 11.15,-5.6 12.025,-5.6 12.9,-5.6 13.775,-5.6 14.65,-5.6 15.525,-5.6 16.4,-5.6 -18.8,-5 -17.9,-5 -17,-5 0.381,-4.826 -18.8,-4.3 -17.9,-4.3 -17,-4.3 0.381,-3.556 -20.1,-1.9 -19.2,-1.9 -20.1,-1.3 -19.2,-1.3 24.6,3.2 26,3.2 -19.9,6.1 -19.025,6.1 -18.15,6.1 -17.275,6.1 -16.4,6.1 -15.525,6.1 -14.65,6.1 -13.775,6.1 -12.9,6.1 -19.9,8 -19.025,8 -18.15,8 -17.275,8 -16.4,8 -15.525,8 -14.65,8 -13.775,8 -12.9,8 28,8.4 24.6,8.8 17.1,9.3 18.2,9.3 17.1,10.175 18.2,10.175 17.1,11.05 18.2,11.05 17.1,11.925 18.2,11.925 17.1,12.8 18.2,12.8 17.1,13.675 18.2,13.675 17.1,14.55 18.2,14.55 17.1,15.425 18.2,15.425 17.1,16.3 18.2,16.3
  other v3: 24.2,-6.2 25.1,-5.8 25.8,-5.1 24.5,-4.2 26,-4.2 24.6,-3.1 26,-3.1 24.6,-2 26,-2 24.6,-0.9 26,-0.9 24.6,0.1 26,0.1 24.6,1.1 26,1.1 24.6,2.2 26,2.2 27,7.5 28,7.5 24.6,7.8
LED1: R10.1 U3.29 | length 23.4
  Top Layer w0.254: v4(-20.1,-4.4) -17.528,-1.828 U3.29
  Bottom Layer w0.254: v4(-20.1,-4.4) -20.13,-4.429 -20.13,-11.422 -19.3,-12.251 v2(-19.3,-13.2)
LED2: R11.1 U3.14 | length 7.5
  Top Layer w0.354: U3.14 -23.94,-8.821 -22.7,-10.061 -22.7,-12.042 -21.534,-13.208 R11.1
LED_NET: D5.2 U6.16 | length 28.1
  Top Layer w0.254: D5.2 8.255,28.981 8.763,28.473 8.826,28.473 11.3,26 16.6,26 24.6,18 24.6,13.149 24.451,13 22.427,13 U6.16
LED_RX: D3.2 U6.12 | length 29.9
  Top Layer w0.254: D3.2 9.387,27.013 11,25.4 16.4,25.4 20.4,21.4 20.4,8.023 20.549,7.874 U6.12
LED_TX: D4.2 U6.11 | length 30.2
  Top Layer w0.254: D4.2 16.108,24.892 19.8,21.2 19.8,6.753 19.949,6.604 U6.11
MISO_LORA: U3.31 U6.42 | length 8.2
  Top Layer w0.254: U3.31 -3.108,0.712 -1.299,2.521 0.108,2.521 U6.42
MOSI_LORA: U3.36 U6.41 | length 9.8
  Top Layer w0.254: U3.36 -4.062,7.062 -3.6,6.6 -3.6,4.549 -3.388,4.337 0.108,4.337 U6.41
NetC1_1: C1.1 L1.1 U1.2
NetC1_2: C1.2 U1.6 | length 4.6
  Top Layer w0.454: U1.6 9.549,-13.716 11.862,-16.029 C1.2
NetC18_1: C18.1 Q1.1 R17.1 | length 5.7
  Top Layer w0.454: Q1.1 -11.534,-20.757 -10.404,-19.626 -9.644,-19.626 C18.1 -9.296,-19.228 R17.1
NetC19_2: C19.2 R19.1 R24.1 R25.2 U5.2 | length 12.5
  Top Layer w0.454: R19.1 -7.068,-29 -5.199,-29 C19.2 -4.726,-29.373 -3.253,-27.9 -2.9,-27.9 ; U5.2 -2.885,-27.885 -2.9,-27.9 ; R25.2 R24.1 0.691,-28.956 -0.366,-27.9 -2.9,-27.9
NetC20_2: C20.2 R20.2 R21.1 | length 6.3
  Top Layer w0.454: R20.2 -13.462,-26.853 -12.481,-25.872 -11.811,-25.872 ; R21.1 -11.811,-25.872 ; C20.2 -9.371,-26.325 -9.825,-25.872 -11.811,-25.872
NetC21_2: C21.2 R21.2 U4.5 | length 8.8
  Top Layer w0.454: C21.2 -13.888,-22.307 -11.893,-22.307 R21.2 ; R21.2@-12.009,-22.225 -13.1,-21.135 -13.1,-17.484 -12.834,-17.218 -11.949,-17.218 U4.5
NetD1_1: D1.1 R10.2 | length 2.2
  Top Layer w0.454: R10.2 -19.304,-15.507 D1.1
NetD2_1: D2.1 R11.2 | length 2.2
  Top Layer w0.454: D2.1 R11.2
NetD3_1: D3.1 R29.2 | length 2.1
  Top Layer w0.254: R29.2 5.931,27.051 cw(c5.931,27.013) D3.1
NetD4_1: D4.1 R30.2 | length 2.1
  Top Layer w0.254: R30.2 5.931,24.93 cw(c5.931,24.892) D4.1
NetD5_1: D5.1 R31.2 | length 2.1
  Top Layer w0.254: R31.2 5.931,29.083 cw(c5.931,29.045) D5.1
NetJ1_1: J1.1 R28.2 | length 3
  Top Layer w0.454: R28.2 25.471,6.604 25.745,6.877 25.745,7.795 26.8,8.85 J1.1
NetJP4_2: JP4.2 R13.1 | length 33.5
  Top Layer w0.254: v2(-4.6,1.5) -3.038,1.5 -2.519,2.019 -2.519,3.038 R13.1
  Bottom Layer w0.254: JP4.2 -17.78,19.177 -16.203,17.6 -4.749,17.6 -4.6,17.451 v2(-4.6,1.5)
NetJP4_3: JP4.3 R14.1 | length 30.3
  Top Layer w0.254: R14.1 -2.3,5.857 v4(-2.3,9.9)
  Bottom Layer w0.254: JP4.3 -15.24,19.685 -12.825,22.1 -2.9,22.1 -2.3,21.5 v4(-2.3,9.9)
NetJP4_5: JP4.5 R16.1 | length 36.2
  Top Layer w0.254: R16.1 -2.4,-6.845 v2(-2.4,-4.9)
  Bottom Layer w0.254: JP4.5 -10.16,19.685 -8.545,21.3 -3.549,21.3 -3.4,21.151 -3.4,2.3 -2.4,1.3 v2(-2.4,-4.9)
NetJP4_6: JP4.6 R15.1 | length 23.1
  Top Layer w0.254: v2(-18.9,18.1) -18.866,18.1 -18.366,17.6 -9.197,17.6 -7.62,19.177 JP4.6
  Bottom Layer w0.254: v2(-26.7,13.6) -26.7,14.648 -26.7,14.649 cw(c-26.446,14.644) -26.67,14.764 -26.669,14.766 cw(c0,0) -25.111,17.284 cw(c-24.902,17.138) -25.083,17.317 -24.8,17.6 -19.434,17.6 -18.934,18.1 v2(-18.9,18.1)
NetQ2_1: Q2.1 R22.2 R23.2
NetQ2_2: Q2.2 R19.2 R20.1 | length 7.3
  Top Layer w0.454: R20.1 -11.176,-27.249 -10.903,-27.523 -10.704,-27.523 -10.327,-27.9 -7.366,-27.9 -7.1,-27.634 -7.1,-26.658 -7.092,-26.65 Q2.2
NetR1_1: R1.1 R3.2 U1.5 | length 5.8
  Top Layer w0.454: R3.2 R1.1 6.444,-12.573 7.46,-11.557 U1.5
NetR2_1: R2.1 R4.2 U1.4 | length 10.9
  Top Layer w0.454: U1.4 9.556,-10.6 10.834,-10.6 11.1,-10.866 11.1,-13 13.1,-15 13.1,-18.034 R2.1
NetR24_2: R24.2 R26.2 U5.1 | length 4.4
  Top Layer w0.454: R26.2 -2.215,-24.878 -1.158,-25.934 -1.158,-26.497 U5.1 -0.947,-26.683 0.876,-26.683 R24.2
NetR28_1: R28.1 U6.2 | length 12
  Top Layer w0.254: U6.2 24.286,-5.306 25.3,-4.292 R28.1@25.3,4.291
  Top Layer w0.454: R28.1 R28.1@25.3,4.291
OUTB: Q1.3 R18.1 U4.6 U4.7 | length 10.1
  Top Layer w0.454: R18.1 -16.778,-19.834 -14.226,-19.834 Q1.3 -14.204,-16.028 -14.051,-15.875 U4.6 U4.7
PIN_8: R22.1 U3.24 | length 34.7
  Bottom Layer w0.254: v2(-9.725,-7.908) 3.351,-7.908 3.5,-8.057 3.5,-18.8 3.3,-19 v2(-7.1,-19)
PIN_11: JP2.5 U3.11 | length 5.2
  Top Layer w0.254: JP2.5 -26.86,-5.08 -25.202,-3.421 -24.263,-3.421 U3.11
PIN_12: JP2.4 U3.12 | length 11.1
  Top Layer w0.254: JP2.4 -28.575,-2.54 -29.781,-3.746 -29.781,-6.118 -29.5,-6.4 -27.4,-6.4 -25.368,-4.368 U3.12
PIN_13: JP2.3 U3.8 | length 4.7
  Top Layer w0.254: JP2.3 -26.312,0 -25.6,0.712 U3.8
PIN_23: R5.1 R6.2 U3.23 | length 6.1
  Top Layer w0.454: U3.23 -10.995,-9.934 -10.65,-10.279 -9.279,-10.279 R5.1 R6.2
PIN_25: R16.2 U3.25 | length 2.3
  Top Layer w0.454: U3.25 -4.749,-6.908 R16.2
RELAY: JP3.5 U3.9 | length 108
  Top Layer w0.254: U3.9 -22.542,-0.558 v2(-20.1,-3)
  Bottom Layer w0.254: v2(-20.1,-3) -17.4,-3 -13.9,-6.5 -0.849,-6.5 -0.7,-6.351 -0.7,28.5 1.1,30.3 3.214,30.3 ccw(c3.214,30.554) 3.222,30.3 3.3,30.302 cw(c3.307,30.049) 3.335,30.301 cw(c0,0) 19.794,23.183 cw(c0,0) 27.377,13.409 ; 27.377,13.408 cw(c0,0) 29.609,7.253 cw(c0,0) 29.842,6.221 cw(c0,0) 30.163,4.41 cw(c29.912,4.374) 30.107,4.211 cw(c28.16,5.842) 28.16,3.302 JP3.5
RST_LORA: RST.1 U3.37 U6.15 | length 72.3
  Top Layer w0.454: RST.1 -8.055,22.277 -4.9,19.122 ; U3.37 -6.908,8.3 -5.166,8.3 -4.9,8.566 -4.9,19.122 ; v1(2.9,14.8) 2.9,15.899 0.949,17.849 -3.627,17.849 -4.9,19.122
  Bottom Layer w0.454: v1(2.9,14.8) 2.9,28.785 3.754,29.639 cw(c0,0) 19.367,22.749 cw(c19.072,22.403) 19.394,22.724 20.712,21.405 21.637,20.48 cw(c19.841,18.684) 22.381,18.684 v2(22.381,11.684)
RX0: R13.2 U3.34 | length 2.2
  Top Layer w0.454: U3.34 -6.717,4.299 -5.857,4.299 R13.2@-5.099,3.541
RX0_LORA: JP5.3 U6.7 | length 29.4
  Bottom Layer w0.254: JP5.3 9.728,8.472 16.7,1.5 v2(22.4,1.5)
RX_GPS: JP1.3 U3.13 | length 7.1
  Top Layer w0.454: U3.13 -23.902,-5.6 -22.466,-5.6 -22.2,-5.866 -22.2,-9.556 -21.412,-10.344 JP1.3
SCK_LORA: U3.30 U6.43 | length 8.2
  Top Layer w0.254: U3.30 -3.659,-0.558 -1.85,1.251 0.108,1.251 U6.43
TEMP_IN: C15.2 R8.1 R9.2 U3.5 | length 35.5
  Top Layer w0.454: R9.2 -16.034,24.543 C15.2 -11.43,24.797 R8.1
  Bottom Layer w0.254: v2(-23.9,4.5) -23.981,4.5 -29.371,9.89 cw(c0,0) -24.247,19.303 cw(c0,0) -20.501,23.242 cw(c-20.334,23.051) -20.335,23.305 R9.2
TEMP_OUT: C14.2 JP3.3 R7.1 U3.4 | length 136.8
  Top Layer w0.454: C14.2 -25.318,-13.304 R7.1@-23.45,-13.304
  Bottom Layer w0.254: v2(-23.9,5.8) -22.699,4.599 -22.699,3.099 ; v2(-23.4,-13.2) -23.315,-13.115 -22.882,-13.115 -22.699,-12.932 -22.699,3.099 ; JP3.3 29.36,-1.778 ccw(c29.36,0.762) 30.871,-1.279 ccw(c30.719,-1.076) 30.973,-1.086 ccw(c0,0) 30.873,2.71 ccw(c0,0) 30.71,4.172 ccw(c0,0) 30.351,6.273 ccw(c0,0) 30.117,7.314 ccw(c0,0) 27.885,13.525 ccw(c0,0) 20.139,23.556 ccw(c0,0) 3.065,30.84 ccw(c0,0) 2.46,30.894 ccw(c2.441,30.641) 2.442,30.895 0.8,30.895 -1.3,28.795 -1.3,-5.751 -1.449,-5.9 -13.7,-5.9 -22.699,3.099
TX0: R14.2 U3.35 | length 2.4
  Top Layer w0.454: U3.35 -5.099,5.792 -4.826,5.519 R14.2@-4.826,5.334
TX0_LORA: JP5.2 U6.8 | length 35.1
  Bottom Layer w0.254: JP5.2 7.239,9.961 16.7,0.5 23.251,0.5 23.4,0.649 23.4,1.8 v4(22.4,2.8)
TX_GPS: JP1.2 U3.16 | length 3.3
  Top Layer w0.454: U3.16 -19.885,-9.589 -18.923,-10.551 JP1.2
pads on no net: JP3.6 U3.6 U3.7 U3.17 U3.18 U3.19 U3.20 U3.21 U3.22 U3.26 U3.27 U3.28 U3.32 U3.33 U4.1 U4.2 U4.3 U6.4 U6.5 U6.9 U6.10 U6.13 U6.14 U6.17 U6.18 U6.19 U6.20 U6.21 U6.22 U6.23 U6.24 U6.25 U6.26 U6.27 U6.28 U6.29 U6.30 U6.31 U6.33 U6.36 U6.37 U6.38 U6.39 U6.40 U6.44 U6.45 U6.46

## Polygon pours and split planes (outlines as drawn)
GND on Top Layer "GND_L01_P001" (solid, pour order 1): -31.5,0 ccw(c0,0) 0,-31.5 ccw(c0,0) 31.5,0 ccw(c0,0) 0,31.5 ccw(c0,0)
GND on Bottom Layer "GND_L02_P002" (solid, pour order 2): -31.5,0 ccw(c0,0) 0,-31.5 ccw(c0,0) 31.5,0 ccw(c0,0) 0,31.5 ccw(c0,0)

## Keep-outs
Keep-Out Layer:
  circle w0.254: c0,0 r31.5
  lines w0.254: -24.511,10.668 -6.35,10.668 -6.35,17.145 -24.511,17.145 -24.511,10.668

## Other copper
Top Layer:
  region net +3.3V: -29.4,4.2 -27.2,4.2 -27.2,6.9 -26,6.9 -26,7.8 -22.9,7.8 -22.9,8.9 -29.4,8.9
  region net +12V: -4.1,-13.8 -1.9,-16 -1.9,-17.9 3.4,-17.9 3.4,-25.6 3.8,-26 3.8,-27.3 2,-27.3 2,-25.6 0.2,-25.6 0.2,-24 2.3,-24 2.3,-18.5 -3.5,-18.5 -3.5,-15.8 -4.1,-15.2
  region net +3.3V: -5.7,-12 2.9,-12 2.9,-14.1 8.2,-14.1 8.2,-17.6 -1.6,-17.6 -1.6,-13.8 -3.2,-13.8 -3.9,-13.1 -5.7,-13.1
  region net NetQ2_1: -7.9,-23.5 -6.4,-23.5 -6.4,-22 -4.1,-22 -4.1,-20.8 -7.9,-20.8
  region net +12V: -10,-12 -12.1,-12 -12.1,-13.8 -10,-13.8
  region net +12V: -17.4,-9.6 -17.4,-12 -14.6,-12 -12.8,-13.8 -10,-13.8 -14.2,-9.6
  region net +12V: -10,-13.8 -10,-12 -8.4,-12 -8.4,-13.8
  region net +12V: -10,-13.8 -4.1,-13.8 -4.1,-15.2 -10,-15.2
  region net +3.3V: 5.9,-22.4 7.1,-22.4 7.1,-16.2 5.9,-16.2
  region net +5V: 6.5,-22.7 9.6,-22.7 9.6,-25.8 6.5,-25.8
  region net +5V: 16.9,-19.7 20,-19.7 20,-23 8.2,-23 8.2,-19.9 9.4,-19.9 9.4,-21.8 13.6,-21.8 13.6,-19.8 15.1,-19.8 15.1,-21.8 16.9,-21.8
  region net NetC1_1: 11.8,-11.2 14.5,-11.2 14.5,-15.4 16.9,-15.4 16.9,-14.2 20,-14.2 20,-16.9 13.7,-16.9 13.7,-11.9 11.8,-11.9
  region net +12V: 11.684,-9.425 23.495,-9.425 23.495,-8.255 26.797,-8.255 26.797,-5.588 29.337,-5.588 29.337,-8.001 25.527,-11.811 23.495,-11.811 23.495,-10.922 11.684,-10.922
Bottom Layer:
  region net +12V: 2.3,-22.9 3.4,-22.9 3.4,-27.3 2.3,-27.3
  region net +3.3V: -3.3,-13.6 -3.3,-12 2.9,-12 2.9,-13.6
  region net +5V: 10.3,-23 16.6,-23 16.6,-21.5 10.3,-21.5

## Silkscreen, mask and mechanical layers (free items; w line width, h text height)
Top Overlay:
  text "RLAY" at 29.954,4.946 h1 r270
  text "12V" at 23.554,-7.646 h1
  text "DIM 11 12 13 G 3V" at -25.224,-8.8 h2 r90

## Text inside footprints (layer, text, board x,y; h text height)
C2: Top Overlay "+" at 24.582,-10.296 h1.2 r270
C9: Top Overlay "+" at 7.183,-24.393 h1.2 r270
C13: Top Overlay "+" at -0.564,-15.884 h1.2 r270
U3: Mechanical 13 "ANTENNA" at -21.44,13.342 h1.2